# Altium PCB MainBoard-16.PcbDoc (part 2 of 2)
Units mm, origin at the board's own origin, x right, y up, seen from the top; angles counter-clockwise.
Board outline 115 x 110 mm, 2 copper layers (Top Layer, Bottom Layer); 86 components, 82 nets, 332 pads, 568 vias.
Unrouted connection lines stored in the file: 1.
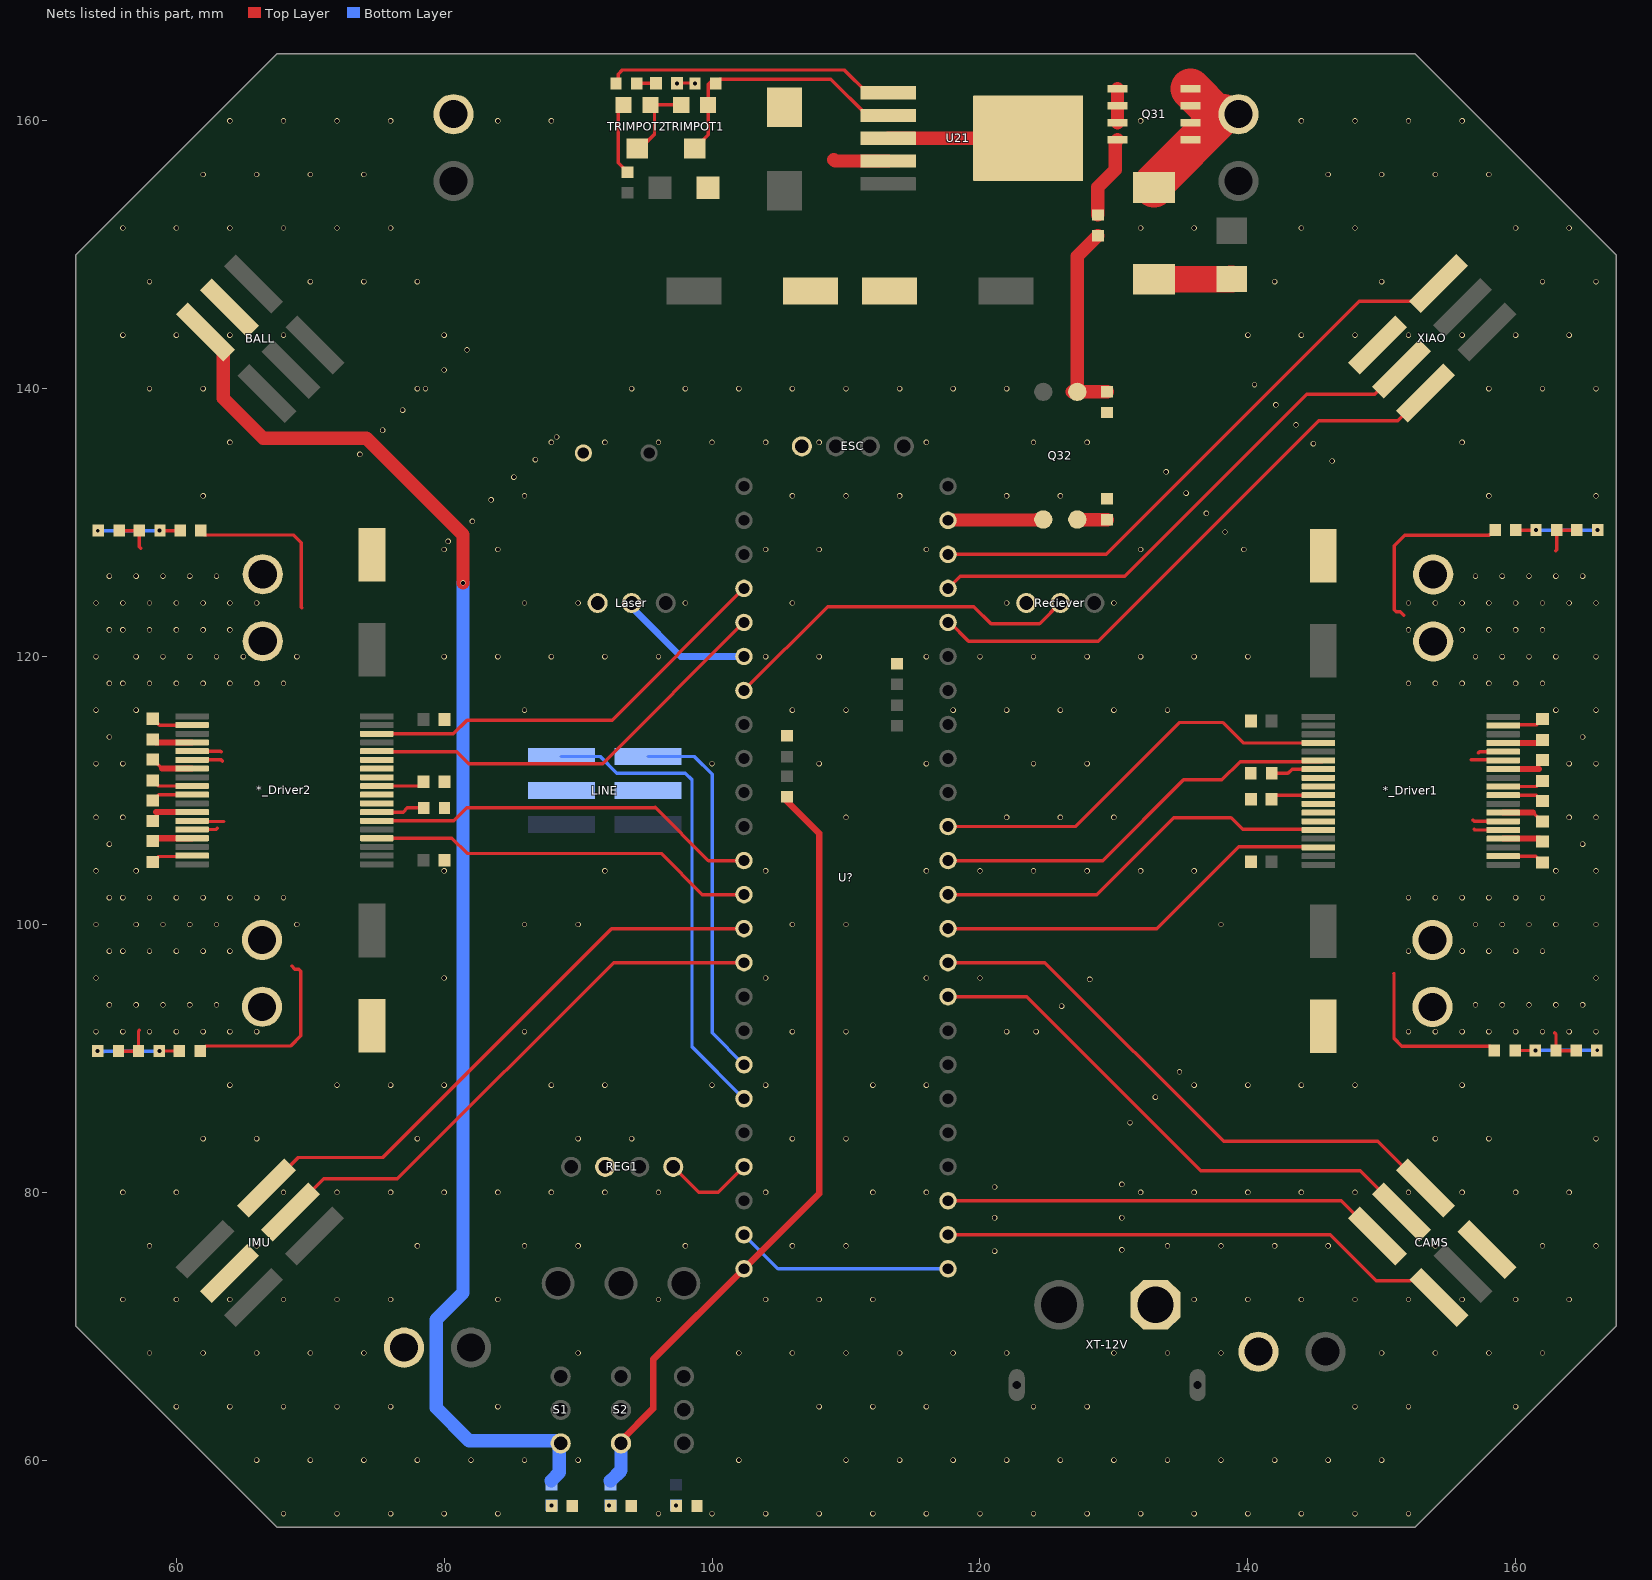
[diagram p2: the nets of this part, all layers, seen from the top]

## Via types
v1: diameter 0.4, hole 0.3, Top Layer to Bottom Layer, tented both sides, 552 vias
v2: diameter 6, hole 3, Top Layer to Bottom Layer, 8 vias
v3: diameter 0.5, hole 0.3, Top Layer to Bottom Layer, 3 vias
v4: diameter 0.4, hole 0.256, Top Layer to Bottom Layer, tented both sides, 2 vias
v5: diameter 0.8, hole 0.3, Top Layer to Bottom Layer, tented both sides, 2 vias
v6: diameter 0.8, hole 0.4, Top Layer to Bottom Layer, tented both sides, 1 vias

## Nets (pads, with @x,y where several pads share a name; then routed paths per layer and width w, separated by ;. In a path a pad name is that pad's centre, name@x,y a point inside that pad or via, vN(x,y) a via of type N, cw(c..) or ccw(c..) an arc to the next point about the centre after c; other vN are vias at no path point) (continued)
GND: *_Driver1.8 *_Driver1.9 *_Driver1.11 *_Driver1.12 *_Driver1.13 *_Driver1.23 *_Driver1.24 *_Driver1.31 *_Driver1.32 *_Driver2.8 *_Driver2.9 *_Driver2.11 *_Driver2.12 *_Driver2.13 *_Driver2.23 *_Driver2.24 *_Driver2.31 *_Driver2.32 BALL.2 BZ?.2 C0_Driver1.2 C0_Driver2.2 C1.1 C1_Driver1.1 C1_Driver2.1 C2.1 C2_Driver1.1 C2_Driver2.1 C3.1 C-AB_Driver1.1 C-AB_Driver2.1 C-DC_Driver1.1 C-DC_Driver2.1 CAMS.3 DB.C DM.C DT.C ESC.4 IMU.5 Laser.3 LINE.2 LINE.5 Q31.S R3_Driver1.2 R3_Driver2.2 R10K.2@113.8,119.475 R22.1 R30K.2 R32.1 R33.1 Reciever.3 REG1.GND U21.3 U21.6 U?.GND U?.GND1 XIAO.1 XT31.N XT-3V.N XT-12V.N XT-ESC.N | length 43.4
  Top Layer w0.254: *_Driver2.32@61.573,107.087 62.943,107.087 63.045,107.188 ; *_Driver2.31@61.573,107.737 61.622,107.688 63.545,107.688 ; *_Driver2.24@61.573,112.287 63.346,112.287 63.445,112.188 ; *_Driver2.23@61.573,112.937 63.296,112.937 63.345,112.888 ; C2.1@97.3,162.825 R22.1@98.975,162.825 ; 156.7,112.3 158.623,112.3 *_Driver1.31@158.671,112.251 ; 156.8,107.8 156.899,107.701 *_Driver1.24@158.671,107.701 ; 156.9,107.1 156.949,107.051 *_Driver1.23@158.671,107.051 ; 157.2,112.8 157.301,112.901 *_Driver1.32@158.671,112.901
  Top Layer w1: U21.3@113.15,158.7 U21.6@121.2,158.7 ; Q31.S@130.274,159.854 Q31.S@130.274,162.394
  Bottom Layer w0.254: U?.GND@102.38,76.83 104.92,74.29 U?.GND1@117.62,74.29
  Bottom Layer w3: XT-12V.N@133.1,71.6 XT-12V.N@133.408,71.292
  other v1: 68,56 72,56 76,56 80,56 84,56 96,56 100,56 104,56 108,56 112,56 116,56 120,56 124,56 128,56 132,56 136,56 140,56 144,56 148,56 152,56 66,60 70,60 74,60 78,60 82,60 86,60 90,60 102,60 110,60 114,60 118,60 122,60 126,60 130,60 134,60 138,60 142,60 146,60 150,60 60,64 64,64 68,64 72,64 76,64 84,64 108,64 112,64 116,64 124,64 128,64 148,64 152,64 160,64 58,68 62,68 66,68 70,68 74,68 90,68 102,68 106,68 110,68 114,68 118,68 122,68 130,68 134,68 138,68 150,68 154,68 158,68 162,68 56,72 60,72 64,72 68,72 72,72 76,72 84,72 96,72 104,72 108,72 112,72 136,72 140,72 144,72 148,72 152,72 156,72 160,72 164,72 121.1,75.6 130.6,75.7 58,76 66,76 78,76 86,76 90,76 98,76 106,76 110,76 134,76 138,76 142,76 146,76 154,76 162,76 166,76 121.1,78.1 130.6,78.1 56,80 60,80 68,80 72,80 76,80 80,80 84,80 88,80 92,80 96,80 104,80 112,80 116,80 132,80 136,80 140,80 144,80 148,80 152,80 156,80 160,80 164,80 121.1,80.4 130.6,80.6 62,84 66,84 78,84 90,84 94,84 106,84 110,84 154,84 158,84 166,84 131.2,85.2 133.1,87.1 64,88 72,88 76,88 80,88 88,88 92,88 100,88 104,88 112,88 116,88 136,88 140,88 144,88 148,88 156,88 134.9,89 86,92 106,92 110,92 122,92 124.2,92 126.1,93.9 128.2,95.9 80,96 104,96 116,96 120,96 86,100 90,100 106,100 110,100 138,100 80,104 92,104 104,104 116,104 120,104 124,104 128,104 132,104 136,104 110,108 122,108 126,108 130,108 100,112 108,112 116,112 124,112 128,112 86,116 106,116 110,116 118,116 122,116 126,116 130,116 134,116 80,120 84,120 88,120 92,120 96,120 104,120 108,120 116,120 120,120 124,120 128,120 132,120 136,120 140,120 86,124 90,124 98,124 106,124 122,124 130,124 80,128 84,128 104,128 108,128 116,128 132,128 139.7,128 80.3,128.6 138.3,129.3 82.1,130.1 136.9,130.7 83.5,131.7 62,132 86,132 106,132 110,132 114,132 122,132 126,132 158,132 166,132 135.4,132.2 85.2,133.4 133.9,133.8 146.3,134.6 86.8,134.7 73.7,135.1 144.9,135.9 64,136 88,136 92,136 96,136 100,136 104,136 108,136 116,136 124,136 128,136 156,136 88.4,136.4 75.4,136.9 143.6,137.3 76.9,138.4 142.1,138.8 58,140 62,140 78,140 78.6,140 94,140 98,140 102,140 106,140 110,140 114,140 118,140 122,140 158,140 162,140 166,140 140.5,140.3 80,141.4 81.7,142.9 56,144 60,144 64,144 68,144 80,144 140,144 144,144 148,144 152,144 156,144 160,144 164,144 58,148 70,148 74,148 78,148 142,148 150,148 162,148 166,148 56,152 60,152 64,152 68,152 72,152 76,152 132,152 136,152 144,152 148,152 160,152 164,152 62,156 66,156 70,156 74,156 146,156 150,156 154,156 158,156 64,160 68,160 72,160 76,160 84,160 88,160 132,160 144,160 148,160 152,160 156,160 97.375,162.8 98.725,162.8
IMU-RX: IMU.3 U?.16 | length 43.7
  Top Layer w0.254: IMU.3@66.75,80.25 69.1,82.6 75.4,82.6 92.49,99.69 U?.16@102.38,99.69
IMU-TX: IMU.2 U?.17 | length 41.6
  Top Layer w0.254: IMU.2@68.53,78.53 71,81 76.5,81 92.65,97.15 U?.17@102.38,97.15
Laser: Laser.2 U?.38 | length 9.4
  Bottom Layer w0.5: 94.35,123.325 97.665,120.01 U?.38@102.38,120.01
LINE-RX: LINE.6 U?.21 | length 35.9
  Bottom Layer w0.254: LINE.6@88.75,112.54 91.638,112.54 92.878,111.3 98,111.3 98.5,110.8 98.5,90.87 U?.21@102.38,86.99
LINE-TX: LINE.1 U?.20 | length 28
  Bottom Layer w0.254: LINE.1@95.225,112.54 98.66,112.54 100,111.2 100,91.91 U?.20@102.38,89.53
MID+3V: R100K.1 RM.1 S2.1 U?.VIN | length 58
  Top Layer w0.5: S2.1@93.2,61.45 95.6,63.85 95.6,67.51 U?.VIN@102.38,74.29 108,79.91 108,106.8 R100K.1@105.6,109.2
  Bottom Layer w1: RM.1@92.4,58.45 92.425,58.45 93.2,59.225 S2.1@93.2,61.25
MODULE-1: U?.30 XIAO.6 | length 45
  Top Layer w0.254: U?.30@117.62,127.63 129.43,127.63 148.318,146.518 152.926,146.518 XIAO.6@154.252,147.844
MV1-RX: CAMS.1 U?.0 | length 40.4
  Top Layer w0.254: U?.0@117.62,76.83 146.17,76.83 149.6,73.4 152.157,73.4 152.23,73.473 152.935,73.473 CAMS.1@155.484,70.924
MV1-TX: CAMS.6 U?.1 | length 34.9
  Top Layer w0.254: U?.1@117.62,79.37 146.97,79.37 150.838,75.502 CAMS.6@150.906,75.502
MV2-RX: CAMS.5 U?.7 | length 40.5
  Top Layer w0.254: U?.7@117.62,94.61 123.49,94.61 136.5,81.6 148.4,81.6 CAMS.5@151.478,78.522
MV2-TX: CAMS.4 U?.8 | length 42.1
  Top Layer w0.254: U?.8@117.62,97.15 124.85,97.15 138.2,83.8 149.7,83.8 CAMS.4@152.875,80.625
Net*_Driver1_7: *_Driver1.7 R3_Driver1.1 | length 3.6
  Top Layer w0.254: R3_Driver1.1@141.775,111.288 143.003,111.288 143.316,111.601 *_Driver1.7@145.271,111.601
Net*_Driver1_10: *_Driver1.10 C0_Driver1.1 | length 3.6
  Top Layer w0.254: C0_Driver1.1@141.775,109.338 142.088,109.651 *_Driver1.10@145.271,109.651
Net*_Driver1_20: *_Driver1.20 C-D_Driver1.1 | length 3.1
  Top Layer w0.254: *_Driver1.20@159.071,105.101 161.503,105.101 161.975,104.629 C-D_Driver1.1@162,104.629
Net*_Driver1_27: *_Driver1.27 C-C_Driver1.1 | length 3.1
  Top Layer w0.254: *_Driver1.27@159.071,109.651 161.551,109.651 161.975,109.227 C-C_Driver1.1@162,109.227
Net*_Driver1_28: *_Driver1.28 C-B_Driver1.1 | length 3.1
  Top Layer w0.254: *_Driver1.28@159.071,110.301 161.551,110.301 161.975,110.725 C-B_Driver1.1@162,110.725
Net*_Driver1_35: *_Driver1.35 C-A_Driver1.1 | length 3.1
  Top Layer w0.254: *_Driver1.35@159.071,114.851 159.136,114.916 161.567,114.916 161.975,115.323 C-A_Driver1.1@162,115.323
Net*_Driver2_7: *_Driver2.7 R3_Driver2.1 | length 3.6
  Top Layer w0.254: *_Driver2.7@74.973,108.387 76.928,108.387 77.241,108.7 R3_Driver2.1@78.47,108.7
Net*_Driver2_10: *_Driver2.10 C0_Driver2.1 | length 3.6
  Top Layer w0.254: *_Driver2.10@74.973,110.337 78.157,110.337 C0_Driver2.1@78.47,110.65
Net*_Driver2_20: *_Driver2.20 C-D_Driver2.1 | length 3.1
  Top Layer w0.254: C-D_Driver2.1@58.245,115.359 58.27,115.359 58.742,114.887 *_Driver2.20@61.173,114.887
Net*_Driver2_27: *_Driver2.27 C-C_Driver2.1 | length 3.1
  Top Layer w0.254: C-C_Driver2.1@58.245,110.761 58.27,110.761 58.694,110.337 *_Driver2.27@61.173,110.337
Net*_Driver2_28: *_Driver2.28 C-B_Driver2.1 | length 3.1
  Top Layer w0.254: C-B_Driver2.1@58.245,109.263 58.27,109.263 58.694,109.687 *_Driver2.28@61.173,109.687
Net*_Driver2_35: *_Driver2.35 C-A_Driver2.1 | length 3.1
  Top Layer w0.254: C-A_Driver2.1@58.245,104.665 58.27,104.665 58.677,105.073 61.109,105.073 *_Driver2.35@61.173,105.137
NetC2_2: C2.2 R21.1 | length 1.5
  Top Layer w0.254: R21.1@94.375,162.8 C2.2@95.825,162.8
NetD1_2: D1.2 L1.2 U21.4 | length 4.1
  Top Layer w1: 109.1,157.1 109.2,157 U21.4@113.15,157
NetD31_C: D31.C D32.C | length 5.8
  Top Layer w2: D32.C@133,148.17 138.67,148.17 138.7,148.2 D31.C@138.8,148.2
NetD32_A: D32.A Q31.D XT32.P | length 10.9
  Top Layer w3: D32.A@133,155.03 133,155.325 138.175,160.5 137.616,160.5 Q31.D@135.722,162.394
NetD-A_Driver1_C: D-A_Driver1.C D-B_Driver1.A R1_Driver1.1 | length 6.1
  Top Layer w0.254: R1_Driver1.1@160.016,129.438 161.509,129.438 v1(161.517,129.447)
  Bottom Layer w0.254: v1(161.517,129.447) v1(166.117,129.447)
NetD-A_Driver2_C: D-A_Driver2.C D-B_Driver2.A R1_Driver2.1 | length 6.2
  Top Layer w0.254: v1(58.727,90.541) 58.736,90.55 R1_Driver2.1@60.228,90.55
  Bottom Layer w0.254: v1(54.127,90.541) v1(58.727,90.541) ; 54.6,90.5 54.641,90.541
NetD-C_Driver1_A: D-C_Driver1.A D-D_Driver1.C R2_Driver1.2 | length 6.1
  Top Layer w0.254: R2_Driver1.2@159.966,90.588 v1(161.491,90.588)
  Bottom Layer w0.254: v1(161.491,90.588) 161.497,90.594 166.094,90.594 v4(166.1,90.6)
NetD-C_Driver2_A: D-C_Driver2.A D-D_Driver2.C R2_Driver2.2 | length 6.1
  Top Layer w0.254: v1(58.753,129.4) R2_Driver2.2@60.278,129.4
  Bottom Layer w0.254: v4(54.145,129.388) 54.15,129.394 58.747,129.394 v1(58.753,129.4)
NetDB_A: DB.A RB.2
  other v3: 97.3,56.625
NetDM_A: DM.A RM.2
  other v3: 92.3,56.625
NetDT_A: DT.A RT.2
  other v3: 88,56.625
NetQ31_G: Q31.G R31.2 | length 6.2
  Top Layer w1: R31.2@128.8,152.975 128.8,155.047 130.116,156.363 130.116,158.426 Q31.G@130.274,158.584
NetQ32_2: Q32.2 R33.2 | length 2.2
  Top Layer w1: Q32.2@127.28,130.225 R33.2@129.5,130.225
NetQ32_3: Q32.3 R31.1 R32.2 | length 14.9
  Top Layer w1: Q32.3@126.885,139.775 Q32.3@127.27,139.775 ; Q32.3@127.27,139.765 Q32.3@127.27,139.775 ; R31.1@128.8,151.425 127.27,149.895 Q32.3@127.27,139.775 ; R32.2@129.5,139.775 Q32.3@127.27,139.775
NetR21_2: R21.2 U21.1 | length 21.8
  Top Layer w0.254: R21.2@92.825,162.8 92.982,162.957 92.982,163.482 93.3,163.8 109.875,163.8 111.575,162.1 U21.1@113.15,162.1
NetR22_2: R22.2 TRIMPOT1.1 TRIMPOT1.2 U21.2 | length 19.9
  Top Layer w0.254: TRIMPOT1.2@98.7,157.95 98.75,157.95 99.373,158.573 99.373,158.623 99.7,158.95 TRIMPOT1.1@99.7,161.2 99.7,162.725 100.023,163.048 R22.2@100.12,163.048 ; R22.2@100.275,162.8 100.275,162.802 100.573,163.1 108.875,163.1 111.575,160.4 U21.2@113.15,160.4
NetR23_1: R23.1 TRIMPOT2.3 | length 5.7
  Top Layer w0.254: R23.1@93.7,156.175 93,156.875 93,160.727 93.473,161.2 TRIMPOT2.3@93.7,161.2
NetTRIMPOT1_3: TRIMPOT1.3 TRIMPOT2.1 TRIMPOT2.2 | length 5.7
  Top Layer w0.254: TRIMPOT2.2@94.75,158.05 95.7,159 95.7,161.2 95.7,161.3 95.8,161.2 TRIMPOT1.3@97.7,161.2
OPTO: Q32.1 U?.31 | length 6.6
  Top Layer w1: U?.31@117.62,130.17 117.653,130.202 124.197,130.202 Q32.1@124.23,130.235
OUT-A_Driver1: *_Driver1.33 C-A_Driver1.2 R1_Driver1.2 XT1_Driver1.N | length 16.7
  Top Layer w0.254: 151.641,123.088 151.391,123.338 151.09,123.338 150.941,123.487 150.941,128.285 151.72,129.063 158.02,129.063 158.072,129.115 158.168,129.115 158.466,129.413 R1_Driver1.2@158.466,129.438
  Top Layer w0.45: *_Driver1.33@159.071,113.551 161.778,113.551 C-A_Driver1.2@162,113.773
  other v1: 163,116 152,118 154,118 156,118 158,118 160,118 162,118 157,120 159,120 161,120 163,120 152,122 156,122 158,122 160,122 162,122
OUT-A_Driver2: *_Driver2.33 C-A_Driver2.2 R1_Driver2.2 XT1_Driver2.N | length 16.7
  Top Layer w0.254: R1_Driver2.2@61.778,90.55 61.778,90.575 62.076,90.873 62.173,90.873 62.225,90.925 68.525,90.925 69.303,91.703 69.303,96.501 69.154,96.65 68.853,96.65 68.603,96.9
  Top Layer w0.45: C-A_Driver2.2@58.245,106.215 58.467,106.437 *_Driver2.33@61.173,106.437
  other v1: 56,98 58,98 60,98 62,98 64,98 57,100 59,100 61,100 63,100 69,100 56,102 58,102 60,102 62,102 64,102 66,102 68,102 57,104
OUT-B_Driver1: *_Driver1.30 C-B_Driver1.2 D-A_Driver1.A D-B_Driver1.C XT1_Driver1.P | length 5.8
  Top Layer w0.254: 163,127.9 163.067,127.967 D-A_Driver1.A@163.067,129.447 D-B_Driver1.C@164.567,129.447
  Top Layer w0.45: *_Driver1.30@159.071,111.601 161.749,111.601 161.75,111.6
  other v1: 164,112 166,112 165,114 166,116 166,120 152,124 154,124 156,124 158,124 160,124 162,124 164,124 166,124 157,126 159,126 161,126 163,126 165,126
OUT-B_Driver2: *_Driver2.30 C-B_Driver2.2 D-A_Driver2.A D-B_Driver2.C XT1_Driver2.P | length 5.8
  Top Layer w0.254: D-B_Driver2.C@55.677,90.541 D-A_Driver2.A@57.177,90.541 57.177,92.021 57.245,92.088
  Top Layer w0.45: 58.496,108.387 *_Driver2.30@61.173,108.387
  other v1: 54,92 56,92 58,92 60,92 62,92 64,92 66,92 55,94 57,94 59,94 61,94 63,94 54,96 55,98 54,100 55,102 54,104 55,106 54,108 56,108
OUT-C_Driver1: *_Driver1.25 C-C_Driver1.2 D-C_Driver1.C D-D_Driver1.A XT2_Driver1.N | length 6.1
  Top Layer w0.254: 161.301,108.351 161.975,107.677 C-C_Driver1.2@162,107.677 ; 162.9,91.9 163.015,91.785 D-C_Driver1.C@163.015,90.58 D-D_Driver1.A@164.515,90.58
  Top Layer w0.45: *_Driver1.25@159.071,108.351 161.301,108.351
  other v1: 152,92 154,92 156,92 158,92 160,92 162,92 164,92 166,92 157,94 159,94 161,94 163,94 165,94 166,96 166,100 166,104 165,106 164,108 166,108
OUT-C_Driver2: *_Driver2.25 C-C_Driver2.2 D-C_Driver2.C D-D_Driver2.A XT2_Driver2.N | length 6.1
  Top Layer w0.254: D-D_Driver2.A@55.729,129.409 D-C_Driver2.C@57.229,129.409 57.229,128.204 57.345,128.088 ; C-C_Driver2.2@58.245,112.311 58.27,112.311 58.944,111.637
  Top Layer w0.45: 58.943,111.637 *_Driver2.25@61.173,111.637
  other v1: 54,112 56,112 55,114 54,116 55,118 54,120 55,122 54,124 56,124 58,124 60,124 62,124 64,124 66,124 55,126 57,126 59,126 61,126 63,126
OUT-D_Driver1: *_Driver1.22 C-D_Driver1.2 R2_Driver1.1 XT2_Driver1.P | length 15.6
  Top Layer w0.254: 150.891,96.338 150.916,96.313 150.916,91.488 151.491,90.913 157.97,90.913 157.972,90.911 158.118,90.911 158.416,90.613 R2_Driver1.1@158.416,90.588
  Top Layer w0.45: *_Driver1.22@159.071,106.401 161.778,106.401 C-D_Driver1.2@161.889,106.29
  other v1: 152,98 156,98 158,98 160,98 162,98 157,100 159,100 161,100 163,100 152,102 154,102 156,102 158,102 160,102 162,102 163,104
OUT-D_Driver2: *_Driver2.22 C-D_Driver2.2 R2_Driver2.1 XT2_Driver2.P | length 15.6
  Top Layer w0.254: R2_Driver2.1@61.828,129.4 61.828,129.375 62.126,129.077 62.273,129.077 62.275,129.075 68.753,129.075 69.328,128.5 69.328,123.675 69.353,123.65
  Top Layer w0.45: C-D_Driver2.2@58.356,113.698 58.467,113.587 *_Driver2.22@61.173,113.587
  other v1: 57,116 56,118 58,118 60,118 62,118 64,118 66,118 68,118 57,120 59,120 61,120 63,120 65,120 69,120 56,122 58,122 60,122 62,122 64,122
PWM-A1: *_Driver1.4 U?.12 | length 31.5
  Top Layer w0.254: U?.12@117.62,107.31 127.11,107.31 134.875,115.075 138.151,115.075 139.675,113.551 *_Driver1.4@145.271,113.551
PWM-A2: *_Driver2.4 U?.15 | length 29.1
  Top Layer w0.254: *_Driver2.4@74.973,106.437 80.57,106.437 81.707,105.3 96.2,105.3 99.27,102.23 U?.15@102.38,102.23
PWM-B1: *_Driver1.6 U?.11 | length 31.1
  Top Layer w0.254: U?.11@117.624,104.77 129.17,104.77 135.2,110.8 138.072,110.8 139.425,112.153 144.75,112.153 145.573,112.153 *_Driver1.6@145.671,112.251
PWM-B2: *_Driver2.6 U?.14 | length 29.5
  Top Layer w0.254: *_Driver2.6@74.973,107.737 80.712,107.737 81.675,108.7 95.7,108.7 95.75,108.75 99.73,104.77 U?.14@102.38,104.77
PWM-C1: *_Driver1.14 U?.10 | length 30.8
  Top Layer w0.254: U?.10@117.62,102.23 128.73,102.23 134.475,107.975 138.75,107.975 139.625,107.1 141.5,107.1 141.505,107.095 145.627,107.095 *_Driver1.14@145.671,107.051
PWM-C2: *_Driver2.14 U?.37 | length 32.6
  Top Layer w0.254: *_Driver2.14@74.573,112.937 74.617,112.893 80.932,112.893 81.825,112 91.83,112 U?.37@102.38,122.55
PWM-D1: *_Driver1.16 U?.9 | length 30.6
  Top Layer w0.254: U?.9@117.62,99.69 133.215,99.69 139.32,105.795 145.627,105.795 *_Driver1.16@145.671,105.751
PWM-D2: *_Driver2.16 U?.36 | length 31.9
  Top Layer w0.254: *_Driver2.16@74.973,114.237 80.687,114.237 81.7,115.25 92.54,115.25 U?.36@102.38,125.09
Reciever: Reciever.2 U?.39 | length 27.4
  Top Layer w0.254: U?.39@102.38,117.47 108.635,123.725 119.55,123.725 120.825,122.45 124.45,122.45 Reciever.2@126,124
SHDN: REG1.SHDN U?.23 | length 6.9
  Top Layer w0.254: REG1.SHDN@97.1,81.9 99,80 100.47,80 U?.23@102.38,81.91
TOP+3V: BALL.3 RT.1 S1.1 | length 107
  Top Layer w1: BALL.3@62.174,144.234 63.499,142.909 63.499,139.301 66.5,136.3 74.2,136.3 81.4,129.1 v1(81.4,125.5)
  Bottom Layer w1: v1(81.4,125.5) 81.4,72.5 79.4,70.5 79.4,63.9 81.85,61.45 S1.1@88.7,61.45 ; RT.1@88,58.475 88.603,59.078 88.603,61.153 S1.1@88.7,61.25
XIAO-RX: U?.28 XIAO.3 | length 45.7
  Top Layer w0.254: U?.28@117.62,122.55 117.746,122.55 119.146,121.15 128.85,121.15 145.3,137.6 151.192,137.6 XIAO.3@154.516,140.924
XIAO-TX: U?.29 XIAO.2 | length 40.6
  Top Layer w0.254: U?.29@117.62,125.09 118.53,126 130.8,126 144.4,139.6 149.475,139.6 151.345,141.47 XIAO.2@151.47,141.47
pads on no net: *_Driver1.2 *_Driver1.3 *_Driver2.2 *_Driver2.3 ESC.3 U?.2 U?.3 U?.13 U?.22 U?.24 U?.25 U?.27 U?.40 U?.GND3 XT-12V.SH1 XT-12V.SH2
copper on no net:
  other v2: 58.5,86 161.5,86 152.5,87.475 67.5,87.525 67.5,132.5 152.475,132.525 58.5,134 161.5,134

## Polygon pours and split planes (outlines as drawn)
GND on Bottom Layer "GND_L02_P120" (solid, pour order 120): 52.5,165 167.5,165 167.5,55 52.5,55
OUT-D_Driver2 on Bottom Layer "OUT-D_DRIVER2_L02_P131" (solid, pour order 131): 69.5,122.918 68.9,123.518 56.068,123.518 55.75,123.2 55.75,115.6 58.049,113.301 60.511,113.301 60.511,114.424 60.511,116.013 68.795,116.013 69.5,116.718
OUT-A_Driver2 on Bottom Layer "OUT-A_DRIVER2_L02_P130" (solid, pour order 130): 68.475,96.45 69.525,97.5 69.525,103.4 68.988,103.937 60.486,103.937 60.486,105.526 60.486,106.65 58.025,106.65 55.775,104.4 55.775,96.7 56.025,96.45
OUT-C_Driver2 on Bottom Layer "OUT-C_DRIVER2_L02_P129" (solid, pour order 129): 68.475,123.75 68.975,124.25 68.975,128.15 68.4,128.725 53.725,128.725 53.275,128.275 53.275,110.625 53.725,110.175 60.475,110.175 60.475,111.534 60.73,111.534 60.73,111.847 60.676,111.901 60.667,111.891 60.475,111.891 60.475,113.05 57.975,113.05 55.516,115.509 55.516,123.182 55.516,123.291 55.975,123.75
OUT-B_Driver2 on Bottom Layer "OUT-B_DRIVER2_L02_P128" (solid, pour order 128): 68.898,95.709 68.348,96.259 55.798,96.259 55.489,96.568 55.489,104.539 57.911,106.961 60.448,106.961 60.448,108.243 60.448,108.6 60.448,109.959 53.698,109.959 53.248,109.509 53.248,92.109 53.948,91.409 68.448,91.409 68.898,91.859
OUT-D_Driver1 on Bottom Layer "OUT-D_DRIVER1_L02_P079" (solid, pour order 79): 151.819,96.439 150.769,97.489 150.769,103.389 151.306,103.926 159.808,103.926 159.808,105.515 159.808,106.638 162.27,106.638 164.519,104.389 164.519,96.689 164.269,96.439
+12V on Bottom Layer "+12V_L02_P073" (solid, pour order 73): 143.47,129.588 141.3,127.419 141.3,92.408 143.37,90.338 143.42,90.388 149.488,90.388 150.52,91.42 150.52,103.588 151.17,104.238 159.545,104.238 159.545,115.738 151.12,115.738 150.52,116.338 150.52,129.138 150.07,129.588
OUT-C_Driver1 on Bottom Layer "OUT-C_DRIVER1_L02_P075" (solid, pour order 75): 151.397,95.698 151.947,96.248 164.497,96.248 164.806,96.557 164.806,104.527 162.383,106.95 159.847,106.95 159.847,108.231 159.847,108.589 159.847,109.948 166.597,109.948 167.047,109.498 167.047,92.098 166.347,91.398 151.847,91.398 151.397,91.848
OUT-B_Driver1 on Bottom Layer "OUT-B_DRIVER1_L02_P077" (solid, pour order 77): 151.82,123.738 151.32,124.238 151.32,128.138 151.895,128.713 166.57,128.713 167.02,128.263 167.02,110.613 166.57,110.163 159.82,110.163 159.82,111.523 159.565,111.523 159.565,111.835 159.618,111.889 159.628,111.88 159.82,111.88 159.82,113.038 162.32,113.038 164.779,115.497 164.779,123.171 164.779,123.279 164.32,123.738
OUT-A_Driver1 on Bottom Layer "OUT-A_DRIVER1_L02_P081" (solid, pour order 81): 150.795,122.906 151.395,123.506 164.227,123.506 164.545,123.188 164.545,115.588 162.245,113.289 159.784,113.289 159.784,114.412 159.784,116.001 151.499,116.001 150.795,116.706
+12V on Bottom Layer "+12V_L02_P108" (solid, pour order 108): 76.775,90.4 78.8,92.425 78.8,127.725 76.875,129.65 76.825,129.6 70.025,129.6 69.725,129.3 69.725,116.4 69.075,115.75 60.7,115.75 60.7,104.25 69.125,104.25 69.725,103.65 69.725,90.85 70.175,90.4
+12V on Bottom Layer "+12V_L02_P116" (solid, pour order 116): 82.7,143 136.8,143 123.5,156.3 96,156.3
GND on Top Layer "GND_L01_P114" (solid, pour order 114): 52.5,165 52.5,55 167.5,55 167.5,165
OUT-A_Driver2 on Top Layer "OUT-A_DRIVER2_L01_P127" (solid, pour order 127): 69.503,95.7 69.403,95.7 68.653,96.461 56.011,96.461 55.761,96.711 55.761,105.328 57.07,106.637 59.77,106.637 59.77,105.376 59.024,105.376 59.004,105.356 59.004,103.948 68.955,103.948 69.503,103.4
OUT-D_Driver2 on Top Layer "OUT-D_DRIVER2_L01_P126" (solid, pour order 126): 69.503,124.15 69.203,124.15 68.553,123.5 56.053,123.5 55.753,123.2 55.753,114.753 57.205,113.301 59.77,113.301 59.77,114.585 59.066,114.585 59.046,114.605 59.046,116.013 68.816,116.013 69.503,116.7
OUT-C_Driver2 on Top Layer "OUT-C_DRIVER2_L01_P125" (solid, pour order 125): 68.453,123.75 68.953,124.25 68.953,128.15 68.378,128.725 53.703,128.725 53.253,128.275 53.253,110.625 53.703,110.175 58.996,110.175 58.996,111.54 59.002,111.534 60.708,111.534 60.708,111.847 60.654,111.901 60.6,111.847 59.745,111.847 59.745,113.162 56.995,113.162 55.494,114.662 55.494,123.3 55.953,123.75
OUT-B_Driver2 on Top Layer "OUT-B_DRIVER2_L01_P124" (solid, pour order 124): 68.903,95.65 68.353,96.2 55.803,96.2 55.494,96.509 55.494,105.336 57.06,106.902 59.795,106.902 59.795,108.137 59.795,108.612 58.996,108.612 58.996,108.535 58.996,109.9 53.703,109.9 53.253,109.45 53.253,92.05 53.953,91.35 68.453,91.35 68.903,91.8
OUT-C_Driver1 on Top Layer "OUT-C_DRIVER1_L01_P089" (solid, pour order 89): 151.391,95.638 151.941,96.188 164.491,96.188 164.8,96.497 164.8,105.325 163.234,106.891 160.5,106.891 160.5,108.125 160.5,108.6 161.298,108.6 161.298,108.523 161.298,109.888 166.591,109.888 167.041,109.438 167.041,92.038 166.341,91.338 151.841,91.338 151.391,91.788
OUT-A_Driver1 on Top Layer "OUT-A_DRIVER1_L01_P093" (solid, pour order 93): 150.791,124.138 151.091,124.138 151.741,123.488 164.241,123.488 164.541,123.188 164.541,114.741 163.089,113.289 160.525,113.289 160.525,114.573 161.228,114.573 161.248,114.593 161.248,116.001 151.478,116.001 150.791,116.688
OUT-B_Driver1 on Top Layer "OUT-B_DRIVER1_L01_P091" (solid, pour order 91): 151.841,123.738 151.341,124.238 151.341,128.138 151.916,128.713 166.591,128.713 167.041,128.263 167.041,110.613 166.591,110.163 161.298,110.163 161.298,111.528 161.292,111.523 159.586,111.523 159.586,111.835 159.64,111.889 159.694,111.835 160.55,111.835 160.55,113.15 163.3,113.15 164.8,114.65 164.8,123.288 164.341,123.738
GND on Top Layer "GND_L01_P083" (solid, pour order 83): 151.2,104.3 150.5,103.6 150.5,95.2 146.964,95.2 146.964,104.388 146.964,123.986 146.978,124 150.5,124 150.5,116.3 151.1,115.7 157.378,115.7 157.378,104.3
OUT-D_Driver1 on Top Layer "OUT-D_DRIVER1_L01_P095" (solid, pour order 95): 150.791,95.688 150.891,95.688 151.641,96.449 164.284,96.449 164.534,96.7 164.534,105.316 163.225,106.625 160.525,106.625 160.525,105.365 161.271,105.365 161.291,105.344 161.291,103.937 151.339,103.937 150.791,103.388
GND on Top Layer "GND_L01_P097" (solid, pour order 97): 150.541,95.838 150.191,96.188 143.391,96.188 143.041,95.838 143.041,90.688 143.341,90.388 150.241,90.388 150.541,90.688
GND on Top Layer "GND_L01_P099" (solid, pour order 99): 143.491,129.588 143.041,129.138 143.041,124.138 143.391,123.788 150.541,123.788 150.541,129.138 150.091,129.588
+12V on Top Layer "+12V_L01_P101" (solid, pour order 101): 143.041,123.138 143.391,123.488 146.7,123.488 146.7,115.288 143.391,115.288 143.041,115.638
+12V on Top Layer "+12V_L01_P103" (solid, pour order 103): 143.041,96.888 143.491,96.438 146.7,96.438 146.7,105.3 143.3,105.3 143.041,105.041
+48V on Top Layer "+48V_L01_P121" (solid, pour order 121): 78.867,147.133 79.5,146.5 103.7,146.5 103.7,152.3 103,153 99,153 98.3,153.7 98.3,154.5 97.3,155.5 79.004,155.5 79.001,155.503 78.867,155.503
NetD1_2 on Top Layer "NETD1_2_L01_P123" (solid, pour order 123): 101.9,162.5 101.1,161.7 101.1,158.1 98.7,155.7 98.7,153.8 99.2,153.3 103.1,153.3 103.7,153.9 103.7,156.5 110.2,156.5 110.6,156.9 110.6,160.6 108.7,162.5
+12V on Top Layer "+12V_L01_P122" (solid, pour order 122): 104.105,156.2 104.105,149.105 104.1,149.1 104.5,148.7 115.6,148.7 116.1,148.2 116.1,140.7 125.1,140.7 125.7,141.3 125.7,153.8 117.9,153.8 115.5,156.2 104.1,156.2
GND on Top Layer "GND_L01_P110" (solid, pour order 110): 69.703,124.15 70.053,123.8 76.853,123.8 77.203,124.15 77.203,129.3 76.903,129.6 70.003,129.6 69.703,129.3
+12V on Top Layer "+12V_L01_P118" (solid, pour order 118): 103.4,155.5 104.1,156.2 117.6,156.2 124,149.8 124,141.5 123.3,140.8 119.1,140.8 118.4,141.5 118.4,146.8 116.5,148.7 104.1,148.7 103.4,149.4
+48V on Top Layer "+48V_L01_P119" (solid, pour order 119): 97,155.8 78.9,155.8 78.9,146.3 102.2,146.3 102.2,153.3 101.8,153.7 98,153.7 97.6,154.1 97.6,155.2
+12V on Top Layer "+12V_L01_P113" (solid, pour order 113): 77.203,123.1 76.753,123.55 73.545,123.55 73.545,114.688 76.945,114.688 77.203,114.947
+12V on Top Layer "+12V_L01_P112" (solid, pour order 112): 77.203,96.85 76.853,96.5 73.545,96.5 73.545,104.7 76.853,104.7 77.203,104.35
GND on Top Layer "GND_L01_P111" (solid, pour order 111): 76.753,90.4 77.203,90.85 77.203,95.85 76.853,96.2 69.703,96.2 69.703,90.85 70.153,90.4
GND on Top Layer "GND_L01_P109" (solid, pour order 109): 69.045,115.688 69.745,116.388 69.745,124.788 73.28,124.788 73.28,115.6 73.28,96.002 73.267,95.988 69.745,95.988 69.745,103.688 69.145,104.288 62.866,104.288 62.866,115.688

## Silkscreen, mask and mechanical layers (free items; w line width, h text height)
Top Overlay:
  drawing of 39 lines, arcs and shapes, not listed
  text "CAP" at 66.304,158.696 h1 r270
  text "SOL" at 153.621,156.954 h1 r90
  text "B1" at 63.075,149.8 h0.5
  text "B1" at 156.1,149.8 h0.5
  text "3V" at 158.1,147.9 h0.5
  text "G" at 61.375,147.775 h0.5
  text "3V" at 59.425,146.3 h0.5
  text "B2" at 159.9,146.3 h0.5
  text "B2" at 72.5,140.775 h0.5
  text "G" at 146.575,140.175 h0.5
  text "R" at 70.6,138.975 h0.5
  text "T" at 148.2,138.2 h0.5
  text "W" at 111.454,137.354 h1
  text "Y" at 114.054,137.354 h1
  text "-" at 106.454,137.254 h1
  text "T" at 68.75,137.175 h0.5
  text "R" at 150,136.5 h0.5
  text "-" at 90.154,136.454 h1
  text "-" at 91.154,125.454 h1
  text "-" at 123.254,125.454 h1
  text "R" at 125.554,125.454 h1
  text "3V" at 127.654,125.454 h1
  text "L" at 93.679,125.354 h1
  text "5V" at 95.629,125.329 h1
  text "5V" at 88.654,83.554 h1
  text "-" at 91.754,83.454 h1
  text "SHDN" at 96.454,83.454 h1
  text "T2" at 150.15,82.725 h0.5
  text "R" at 69,82.5 h0.5
  text "R2" at 148.55,80.875 h0.5
  text "T" at 70.7,80.7 h0.5
  text "DA" at 72.5,78.9 h0.5
  text "T1" at 146.925,78.875 h0.5
  text "12.6V" at 127.4,74.9 h0.5
  text "G" at 160.2,73 h0.5
  text "3V" at 58.7,72.925 h0.5
  text "3V" at 158.325,71.25 h0.5
  text "G" at 60.8,71.1 h0.5
  text "R1" at 156.6,69.25 h0.5
  text "DC" at 62.725,69.1 h0.5
  text "4.2V" at 71,57.45 h0.5
  text "ESC" at 149.525,57.4 h0.5
Bottom Overlay:
  drawing of 6 lines, arcs and shapes, not listed
  text "T" at 98.525,112.325 h0.5
  text "R" at 85.725,112.225 h0.5
  text "G" at 85.675,109.7 h0.5
  text "G" at 98.55,109.55 h0.5
  text "3V" at 85.675,107.2 h0.5
  text "5V" at 98.9,107.15 h0.5
Mechanical 1:
  circle w0.013: c152.5,132.5 r1.5
  circle w0.013: c152.5,87.5 r1.5
  circle w0.013: c67.5,87.5 r1.5
  circle w0.013: c67.5,132.5 r1.5
  circle w0.013: c58.485,86 r1.5
  circle w0.013: c161.515,86 r1.5
  circle w0.013: c161.515,134 r1.5
  circle w0.013: c58.485,134 r1.5

## Text inside footprints (layer, text, board x,y; h text height)
Q31: Top Overlay "*" at 129.702,162.826 h1.27; Mechanical 13 "*" at 131.068,161.645 h1.27